# Altium PCB Плата.PcbDoc
Units mm, origin at the board's own origin, x right, y up, seen from the top; angles counter-clockwise.
Board outline 115 x 115 mm, 2 copper layers (Top Layer, Bottom Layer); 55 components, 70 nets, 300 pads, 90 vias.
Unrouted connection lines stored in the file: 180.
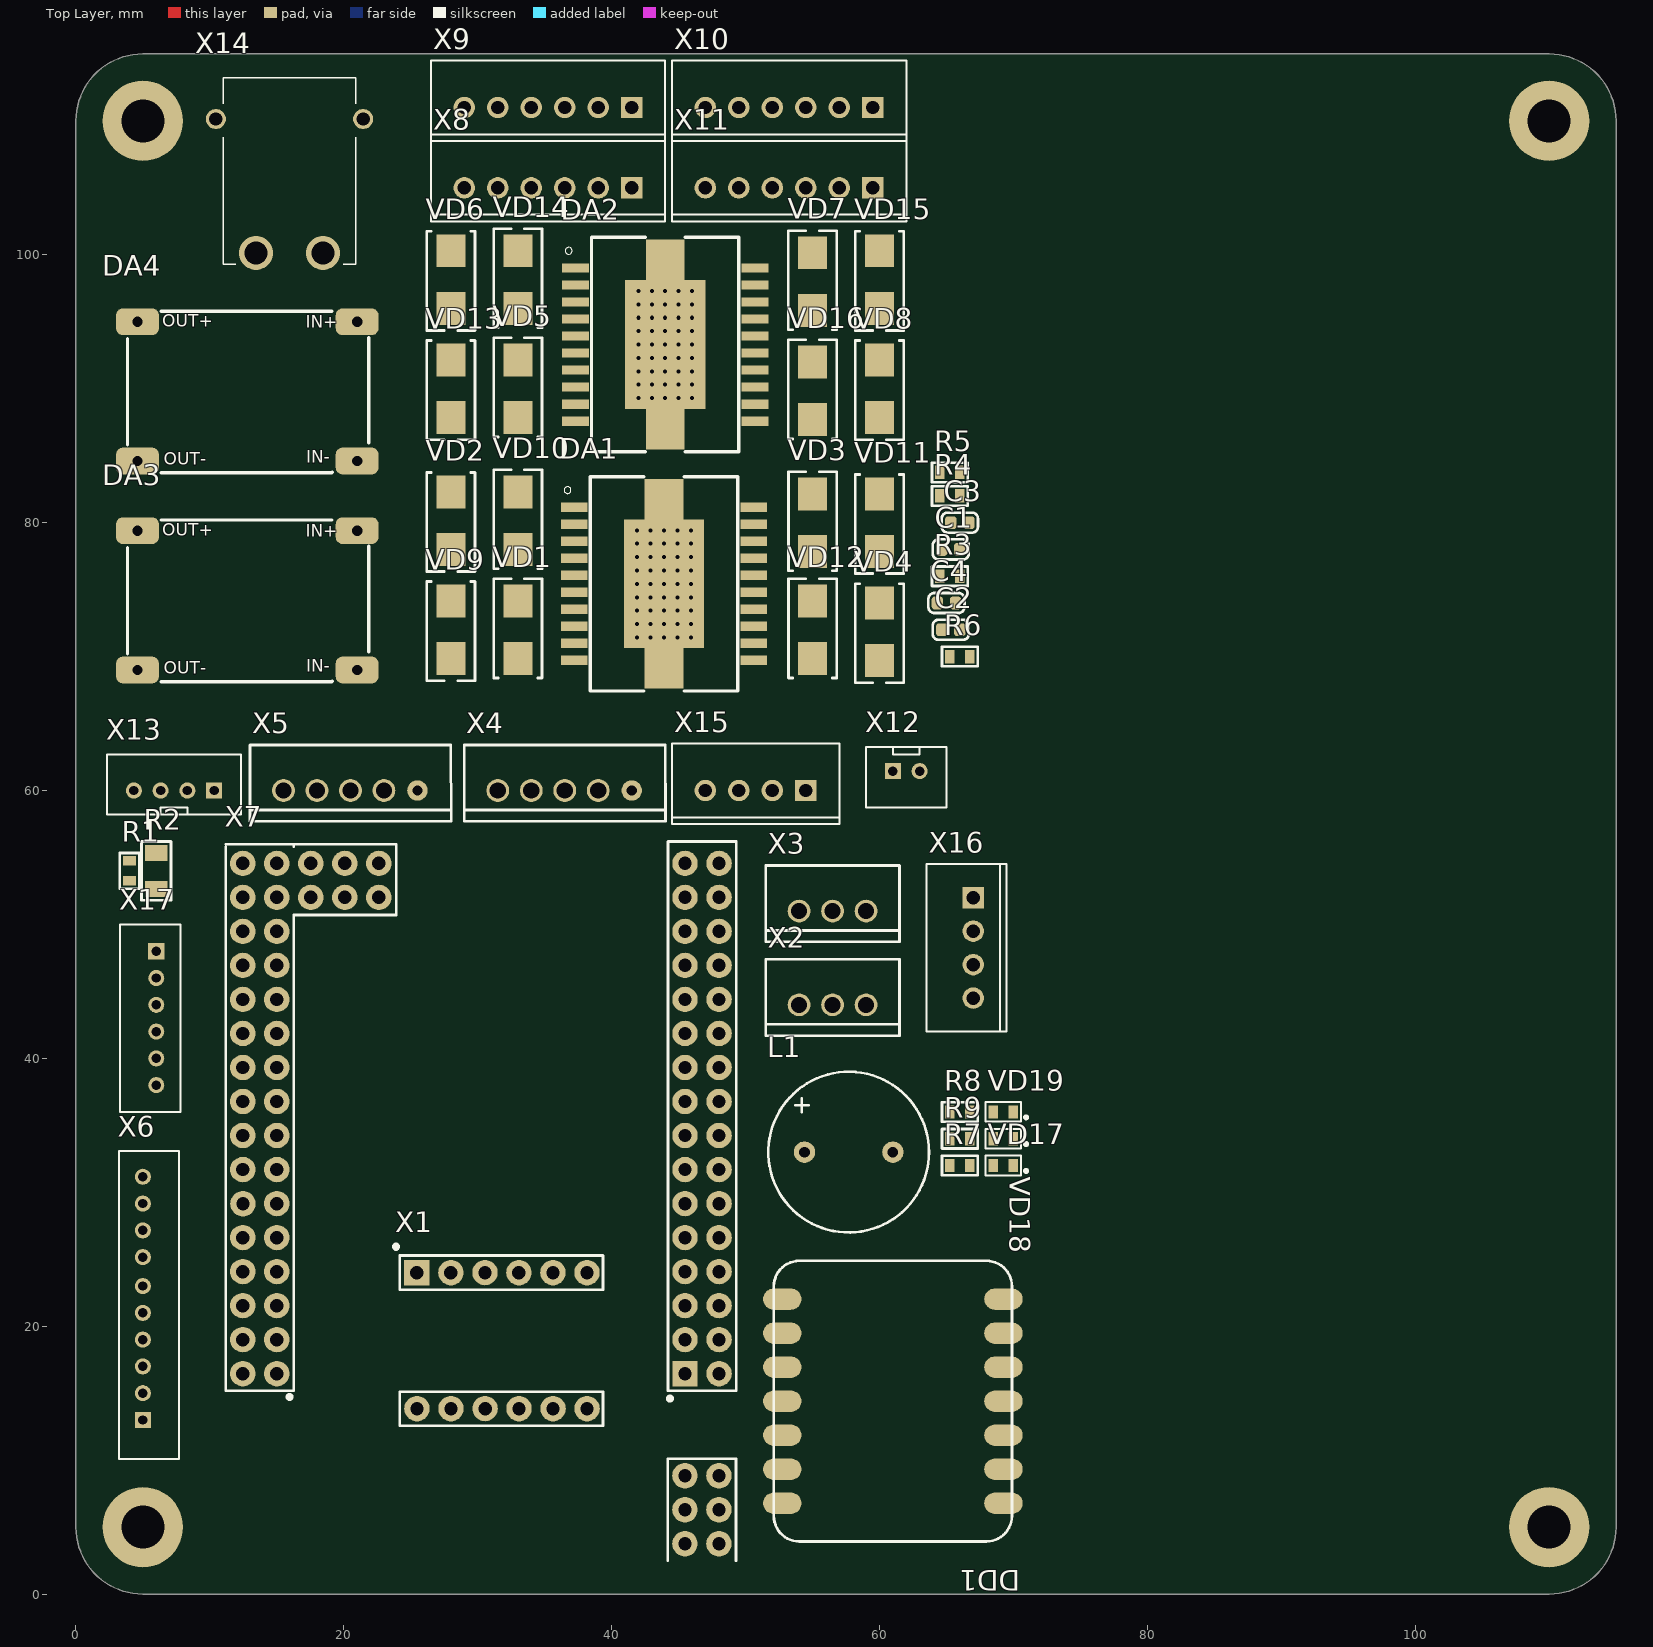
[diagram p0: Top Layer view]
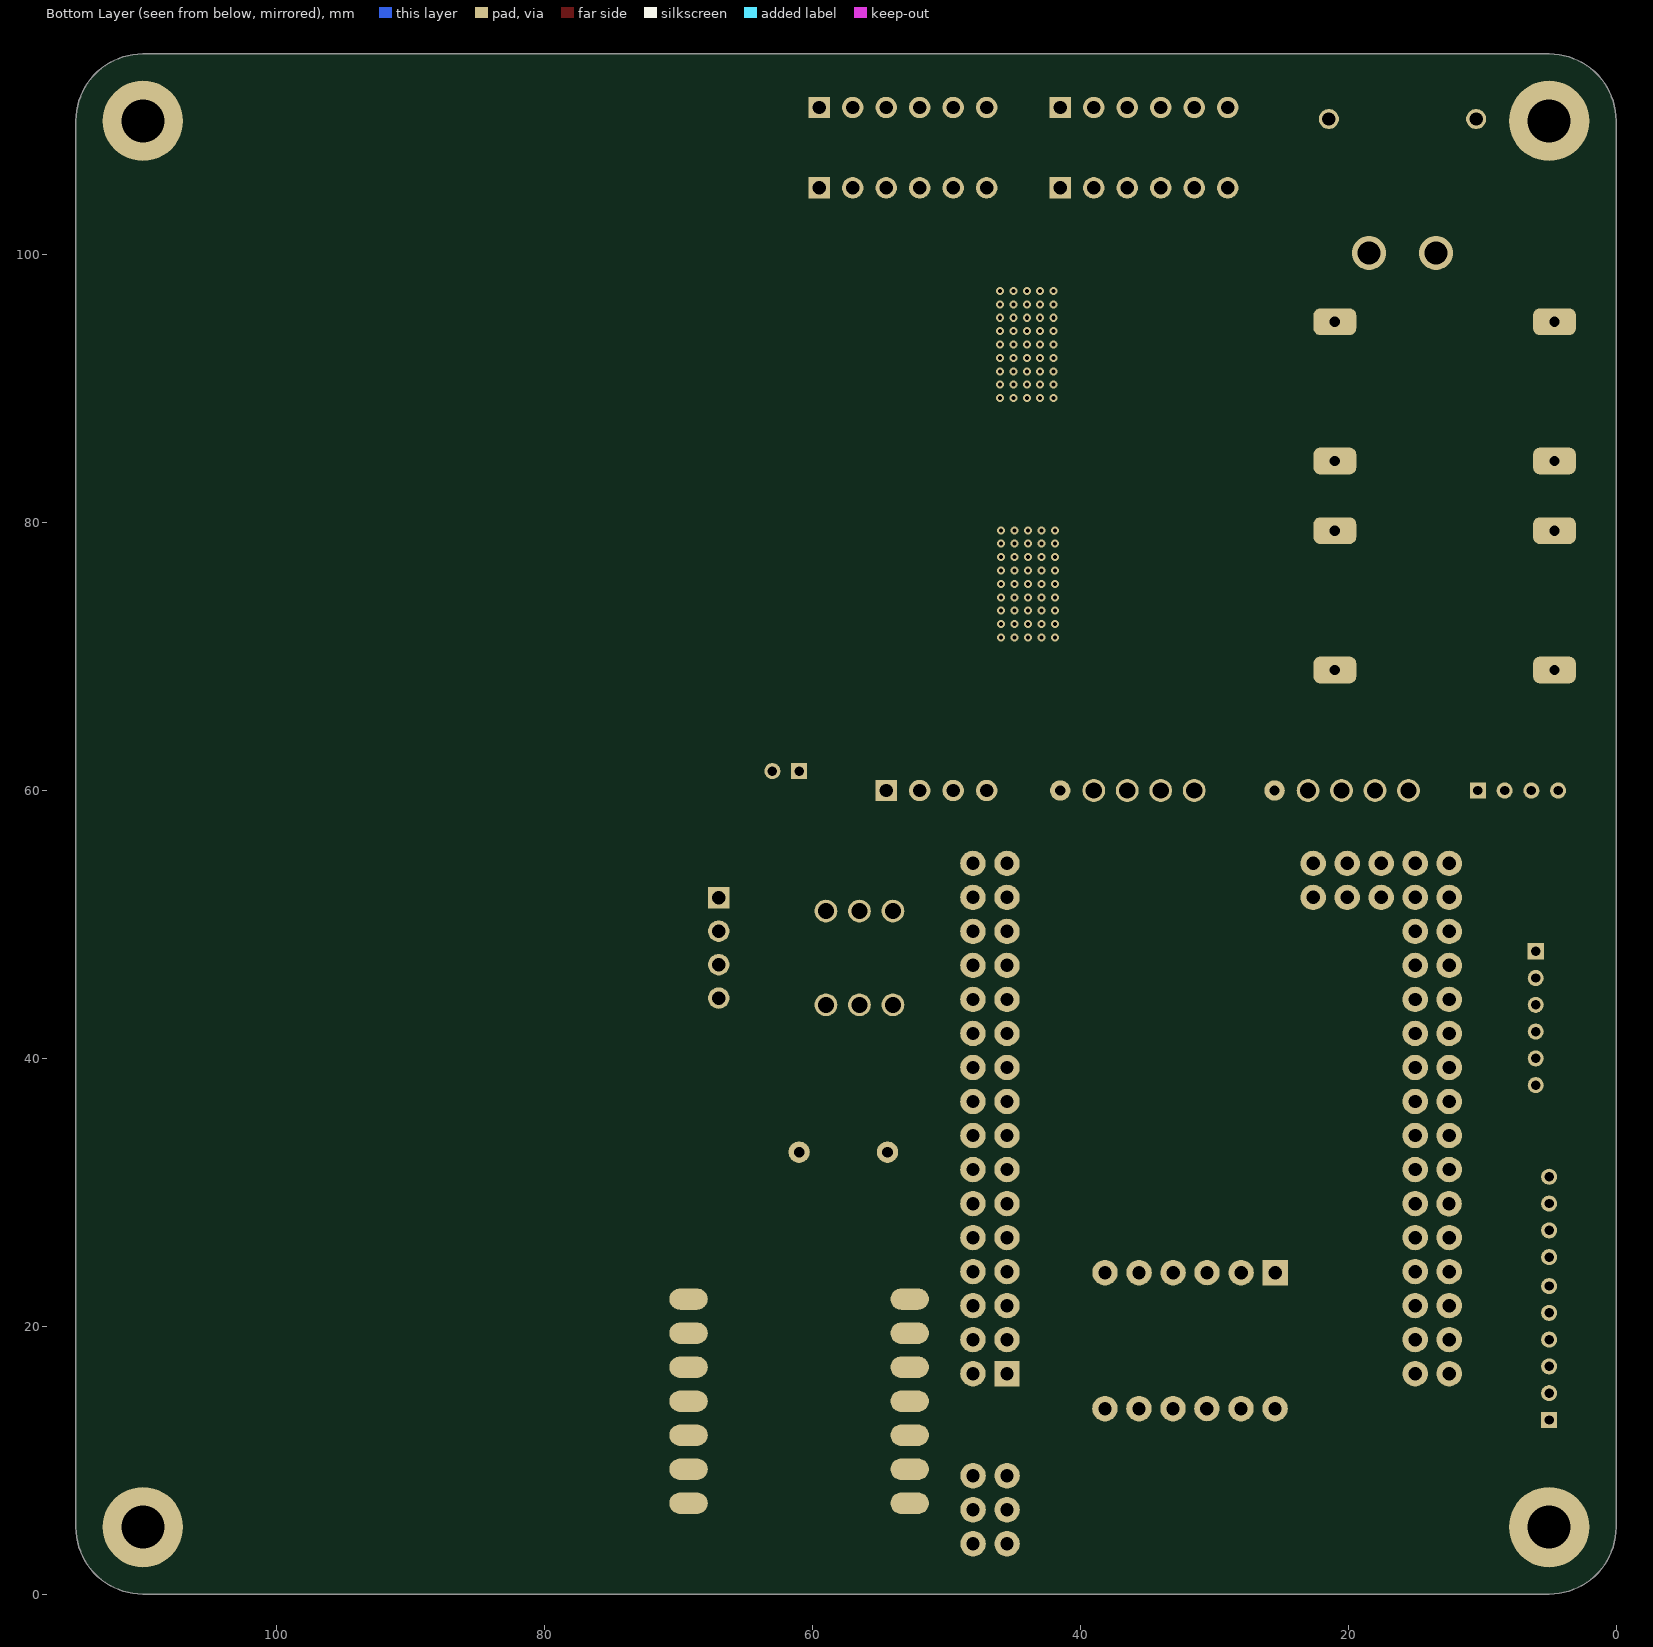
[diagram p1: Bottom Layer view, seen from below]

## Layer stack, top to bottom
Top Solder: solder mask 0.0102, Solder Resist, Dk 3.5
Top Layer: signal copper 0.0356
Dielectric 1: dielectric 0.32, FR-4, Dk 4.8
Bottom Layer: signal copper 0.0356
Bottom Solder: solder mask 0.0102, Solder Resist, Dk 3.5

## Board outline
5,0 cw(c5,5) 0,5 0,110 cw(c5,110) 5,115 110,115 cw(c110,110) 115,110 115,5 cw(c110,5) 110,0

## Design rules (kind name [scope] priority, off if disabled: settings)
AcuteAngle min_acute_angle [OnCopper] p1: minimum=3.50000000000000E+0001 checktracksonly=FALSE // Минимальный угол между примитивами топологии
BoardOutlineClearance board_outline_clearance_std [NOT (OnLayer('Bottom Overlay') OR OnLayer('Top Overlay'))] p1: gap=0.25 ignorepadtopadclearanceinfootprint=FALSE except(0: Arc-SplitContinuation Track-SplitContinuation SMDPad-SplitContinuation THPad-SplitContinuation Via-SplitContinuation Fill-SplitContinuation Poly-SplitContinuation Region-SplitContinuation Text-SplitContinuation) // Отступ элементов топологии от края фрезеруемой печатной платы
Clearance clearance_outer_18um_std [OnTopLayer OR OnBottomLayer] p1: gap=0.125 ignorepadtopadclearanceinfootprint=TRUE except(0.2: Arc-Fill Arc-Poly Track-Fill Track-Poly SMDPad-SMDPad SMDPad-Fill SMDPad-Poly THPad-Fill THPad-Poly Via-Fill Via-Poly Fill-Fill Fill-Poly Poly-Poly Poly-Region Poly-Text; 0.25: Arc-Hole Track-Hole SMDPad-Hole THPad-Hole Via-Hole Fill-Hole Poly-Hole Region-Hole Text-Hole) // Зазоры на внешних слоях
Clearance clearance_inner_18um_std [NOT (OnTopLayer Or OnBottomLayer)] p2: gap=0.125 ignorepadtopadclearanceinfootprint=FALSE except(0.2: Arc-Fill Arc-Poly Track-Fill Track-Poly SMDPad-SMDPad SMDPad-Fill SMDPad-Poly THPad-Fill THPad-Poly Via-Fill Via-Poly Fill-Fill Fill-Poly Poly-Poly Poly-Region Poly-Text; 0.25: Arc-Hole Track-Hole SMDPad-Hole THPad-Hole Via-Hole Fill-Hole Poly-Hole Region-Hole Text-Hole) // Зазоры на внутренних слоях
ComponentClearance [All] p1: gap=0 collisioncheckmode=3 verticalgap=0 showdistances=FALSE
DiffPairsRouting diff_pairs_routing [All] p1: maxlimit=0.127 minlimit=0.127 mostfreqgap=0.127 toplayer_minwidth=0.143 toplayer_maxwidth=0.143 toplayer_prefwidth=0.143 bottomlayer_minwidth=0.143 bottomlayer_maxwidth=0.143 bottomlayer_prefwidth=0.143 impedanceprofiledriven=TRUE impedanceprofileid={FD46899E-B5A2-4EF5-A302-5D2DB6A51F35} maxuncoupledlength=12.7 // Правила трассировки дифференциальных пар
HoleSize min_hole_size_std [IsPad] p1: absolutevalues=TRUE maxlimit=5.9 minlimit=0.6 maxpercent=80.000 minpercent=20.000 // Диаметр межслойного переходного отверстия
HoleSize min_hole_size_via_std [IsVia] p2: absolutevalues=TRUE maxlimit=5.9 minlimit=0.3 maxpercent=80.000 minpercent=20.000 // Минимальный диаметр монтажного отверстия
HoleToHoleClearance hole_to_hole_clearance_std [All] p1: gap=0.2 allowstackedmicrovias=FALSE // Минимальное расстояние между краями двух отверстий
MinimumAnnularRing min_via_ar_std [All] p1: minimumring=0.15 // Поясок площадки переходного отверстия (Annular ring VIA)
MinimumAnnularRing min_pad_ar_std [All] p2: minimumring=0.2 // Поясок монтажной контактной площадки (Annular ring PAD)
MinimumSolderMaskSliver min_solder_mask_bridge_std [All] p1: minsoldermaskwidth=0.15 // Мнимальная ширина масочного мостика
PlaneClearance plane_clearance_18um_std [All] p1: clearance=0.2 // Отступ полигона (для слоя plane) от элементов топологии
PlaneConnect [All] p1: planeconnectstyle=Relief reliefexpansion=0.5 reliefentries=4 reliefconductorwidth=0.2 reliefairgap=0.2
PolygonConnect poly_connect_to_pad<=0.3 [(AsMM(PadXSize_AllLayers)<=0.301) or (AsMM(PadYSize_AllLayers)<=0.301)] p1: thpad.connectstyle=Relief thpad.reliefconductorwidth=0.2 thpad.reliefentries=4 thpad.polygonreliefangle="90 Angle" thpad.airgapwidth=0.2 smdpad.connectstyle=Relief smdpad.reliefconductorwidth=0.2 smdpad.reliefentries=4 smdpad.polygonreliefangle="90 Angle" smdpad.airgapwidth=0.2 via.connectstyle=Direct via.reliefconductorwidth=0.254 via.reliefentries=4 via.polygonreliefangle="90 Angle" via.airgapwidth=0.254 // Правила подключения полигонов для падов от 0,3мм и меньше
PolygonConnect poly_connect_to_pad<=0.4 [(AsMM(PadXSize_AllLayers)<=0.401) or (AsMM(PadYSize_AllLayers)<=0.401)] p2: thpad.connectstyle=Relief thpad.reliefconductorwidth=0.26 thpad.reliefentries=4 thpad.polygonreliefangle="90 Angle" thpad.airgapwidth=0.2 smdpad.connectstyle=Relief smdpad.reliefconductorwidth=0.26 smdpad.reliefentries=4 smdpad.polygonreliefangle="90 Angle" smdpad.airgapwidth=0.2 via.connectstyle=Direct via.reliefconductorwidth=0.254 via.reliefentries=4 via.polygonreliefangle="90 Angle" via.airgapwidth=0.254 // Правила подключения полигонов для падов от 0,4 и меньше
PolygonConnect poly_connect_to_pad<=0.6 [(AsMM(PadXSize_AllLayers)<=0.601) or (AsMM(PadYSize_AllLayers)<=0.601)] p3: thpad.connectstyle=Relief thpad.reliefconductorwidth=0.33 thpad.reliefentries=4 thpad.polygonreliefangle="90 Angle" thpad.airgapwidth=0.2 smdpad.connectstyle=Relief smdpad.reliefconductorwidth=0.33 smdpad.reliefentries=4 smdpad.polygonreliefangle="90 Angle" smdpad.airgapwidth=0.2 via.connectstyle=Direct via.reliefconductorwidth=0.254 via.reliefentries=4 via.polygonreliefangle="90 Angle" via.airgapwidth=0.254 // Правила подключения полигонов для падов от 0,6мм и меньше
PolygonConnect poly_connect_to_pad<=0.7 [(AsMM(PadXSize_AllLayers)<=0.701) or (AsMM(PadYSize_AllLayers)<=0.701)] p4: thpad.connectstyle=Relief thpad.reliefconductorwidth=0.46 thpad.reliefentries=4 thpad.polygonreliefangle="90 Angle" thpad.airgapwidth=0.2 smdpad.connectstyle=Relief smdpad.reliefconductorwidth=0.46 smdpad.reliefentries=4 smdpad.polygonreliefangle="90 Angle" smdpad.airgapwidth=0.2 via.connectstyle=Direct via.reliefconductorwidth=0.254 via.reliefentries=4 via.polygonreliefangle="90 Angle" via.airgapwidth=0.254 // Правила подключения полигонов для падов от 0,7мм и меньше
PolygonConnect poly_connect_to_pad<=0.8 [(AsMM(PadXSize_AllLayers)<=0.8)or(AsMM(PadYSize_AllLayers)<=0.8)] p5: thpad.connectstyle=Relief thpad.reliefconductorwidth=0.53 thpad.reliefentries=4 thpad.polygonreliefangle="90 Angle" thpad.airgapwidth=0.3 smdpad.connectstyle=Relief smdpad.reliefconductorwidth=0.53 smdpad.reliefentries=4 smdpad.polygonreliefangle="90 Angle" smdpad.airgapwidth=0.2 via.connectstyle=Direct via.reliefconductorwidth=0.254 via.reliefentries=4 via.polygonreliefangle="90 Angle" via.airgapwidth=0.254 // Правила подключения полигонов для падов от 0,8мм и меньше
PolygonConnect poly_connect_to_pad<=1 [(AsMM(PadXSize_AllLayers)<=1.01)or(AsMM(PadYSize_AllLayers)<=1.01)] p6: thpad.connectstyle=Relief thpad.reliefconductorwidth=0.6 thpad.reliefentries=4 thpad.polygonreliefangle="90 Angle" thpad.airgapwidth=0.3 smdpad.connectstyle=Relief smdpad.reliefconductorwidth=0.6 smdpad.reliefentries=4 smdpad.polygonreliefangle="90 Angle" smdpad.airgapwidth=0.2 via.connectstyle=Direct via.reliefconductorwidth=0.254 via.reliefentries=4 via.polygonreliefangle="90 Angle" via.airgapwidth=0.254 // Правила подключения полигонов для падов от 1мм и меньше
PolygonConnect poly_connect_to_pad<=1.3 [(AsMM(PadXSize_AllLayers)<=1.31)or(AsMM(PadYSize_AllLayers)<=1.31)] p7: thpad.connectstyle=Relief thpad.reliefconductorwidth=0.66 thpad.reliefentries=4 thpad.polygonreliefangle="90 Angle" thpad.airgapwidth=0.3 smdpad.connectstyle=Relief smdpad.reliefconductorwidth=0.86 smdpad.reliefentries=4 smdpad.polygonreliefangle="90 Angle" smdpad.airgapwidth=0.2 via.connectstyle=Direct via.reliefconductorwidth=0.254 via.reliefentries=4 via.polygonreliefangle="90 Angle" via.airgapwidth=0.254 // Правила подключения полигонов для падов от 1,3мм и меньше
PolygonConnect poly_connect_to_pad<=1.6 [(AsMM(PadXSize_AllLayers)<=1.61)or(AsMM(PadYSize_AllLayers)<=1.61)] p8: thpad.connectstyle=Relief thpad.reliefconductorwidth=0.8 thpad.reliefentries=4 thpad.polygonreliefangle="90 Angle" thpad.airgapwidth=0.3 smdpad.connectstyle=Relief smdpad.reliefconductorwidth=1 smdpad.reliefentries=4 smdpad.polygonreliefangle="90 Angle" smdpad.airgapwidth=0.2 via.connectstyle=Direct via.reliefconductorwidth=0.254 via.reliefentries=4 via.polygonreliefangle="90 Angle" via.airgapwidth=0.254 // Правила подключения полигонов для падов от 1,6мм и меньше
PolygonConnect poly_connect_to_pad<=1.8 [(AsMM(PadXSize_AllLayers)<=1.8)or(AsMM(PadYSize_AllLayers)<=1.8)] p9: thpad.connectstyle=Relief thpad.reliefconductorwidth=1 thpad.reliefentries=4 thpad.polygonreliefangle="90 Angle" thpad.airgapwidth=0.3 smdpad.connectstyle=Relief smdpad.reliefconductorwidth=1.2 smdpad.reliefentries=4 smdpad.polygonreliefangle="90 Angle" smdpad.airgapwidth=0.2 via.connectstyle=Direct via.reliefconductorwidth=0.254 via.reliefentries=4 via.polygonreliefangle="90 Angle" via.airgapwidth=0.254 // Правила подключения полигонов для падов от 1,8мм и меньше
PolygonConnect poly_connect_to_pad<=2 [(AsMM(PadXSize_AllLayers)<=2.01)or(AsMM(PadYSize_AllLayers)<=2.01)] p10: thpad.connectstyle=Relief thpad.reliefconductorwidth=1.1 thpad.reliefentries=4 thpad.polygonreliefangle="90 Angle" thpad.airgapwidth=0.3 smdpad.connectstyle=Relief smdpad.reliefconductorwidth=1.4 smdpad.reliefentries=4 smdpad.polygonreliefangle="90 Angle" smdpad.airgapwidth=0.2 via.connectstyle=Direct via.reliefconductorwidth=0.254 via.reliefentries=4 via.polygonreliefangle="90 Angle" via.airgapwidth=0.254 // Правила подключения полигонов для падов от 2мм и меньше
PolygonConnect poly_connect_to_pad<=2.3 [(AsMM(PadXSize_AllLayers)<=2.31)or(AsMM(PadYSize_AllLayers)<=2.31)] p11: thpad.connectstyle=Relief thpad.reliefconductorwidth=1.2 thpad.reliefentries=4 thpad.polygonreliefangle="90 Angle" thpad.airgapwidth=0.3 smdpad.connectstyle=Relief smdpad.reliefconductorwidth=1.4 smdpad.reliefentries=4 smdpad.polygonreliefangle="90 Angle" smdpad.airgapwidth=0.2 via.connectstyle=Direct via.reliefconductorwidth=0.254 via.reliefentries=4 via.polygonreliefangle="90 Angle" via.airgapwidth=0.254 // Правила подключения полигонов для падов от 2,3мм и меньше
PolygonConnect poly_connect_to_pad<=2.5 [(AsMM(PadXSize_AllLayers)<=2.51)or(AsMM(PadYSize_AllLayers)<=2.51)] p12: thpad.connectstyle=Relief thpad.reliefconductorwidth=1.2 thpad.reliefentries=4 thpad.polygonreliefangle="90 Angle" thpad.airgapwidth=0.3 smdpad.connectstyle=Relief smdpad.reliefconductorwidth=1.4 smdpad.reliefentries=4 smdpad.polygonreliefangle="90 Angle" smdpad.airgapwidth=0.2 via.connectstyle=Direct via.reliefconductorwidth=0.254 via.reliefentries=4 via.polygonreliefangle="90 Angle" via.airgapwidth=0.254 // Правила подключения полигонов для падов от 2,5мм и меньше
PolygonConnect poly_connect_to_pad<=2.7 [(AsMM(PadXSize_AllLayers)<=2.71)or(AsMM(PadYSize_AllLayers)<=2.71)] p13: thpad.connectstyle=Relief thpad.reliefconductorwidth=1.4 thpad.reliefentries=4 thpad.polygonreliefangle="90 Angle" thpad.airgapwidth=0.3 smdpad.connectstyle=Relief smdpad.reliefconductorwidth=1.6 smdpad.reliefentries=4 smdpad.polygonreliefangle="90 Angle" smdpad.airgapwidth=0.2 via.connectstyle=Direct via.reliefconductorwidth=0.254 via.reliefentries=4 via.polygonreliefangle="90 Angle" via.airgapwidth=0.254 // Правила подключения полигонов для падов от 2,7мм и меньше
PolygonConnect poly_connect_to_pad<=3 [(AsMM(PadXSize_AllLayers)<=3.01)or(AsMM(PadYSize_AllLayers)<=3.01)] p14: thpad.connectstyle=Relief thpad.reliefconductorwidth=1.6 thpad.reliefentries=4 thpad.polygonreliefangle="90 Angle" thpad.airgapwidth=0.3 smdpad.connectstyle=Relief smdpad.reliefconductorwidth=1.8 smdpad.reliefentries=4 smdpad.polygonreliefangle="90 Angle" smdpad.airgapwidth=0.2 via.connectstyle=Direct via.reliefconductorwidth=0.254 via.reliefentries=4 via.polygonreliefangle="90 Angle" via.airgapwidth=0.254 // Правила подключения полигонов для падов от 3мм и меньше
PolygonConnect poly_connect_to_pad<=7 [(AsMM(PadXSize_AllLayers)<7.01)or(AsMM(PadYSize_AllLayers)<=7.01)] p15: thpad.connectstyle=Relief thpad.reliefconductorwidth=2 thpad.reliefentries=4 thpad.polygonreliefangle="90 Angle" thpad.airgapwidth=0.4 smdpad.connectstyle=Relief smdpad.reliefconductorwidth=2 smdpad.reliefentries=4 smdpad.polygonreliefangle="90 Angle" smdpad.airgapwidth=0.3 via.connectstyle=Direct via.reliefconductorwidth=0.254 via.reliefentries=4 via.polygonreliefangle="90 Angle" via.airgapwidth=0.254 // Правила подключения полигонов для падов от 7мм и меньше
PolygonConnect poly_connect_to_pad [All] p16: thpad.connectstyle=Relief thpad.reliefconductorwidth=0.25 thpad.reliefentries=4 thpad.polygonreliefangle="90 Angle" thpad.airgapwidth=0.2 smdpad.connectstyle=Relief smdpad.reliefconductorwidth=0.25 smdpad.reliefentries=4 smdpad.polygonreliefangle="90 Angle" smdpad.airgapwidth=0.2 via.connectstyle=Direct via.reliefconductorwidth=0.25 via.reliefentries=4 via.polygonreliefangle="90 Angle" via.airgapwidth=0.2 // Правила подключения полигонов общие
RoutingCorners [All] p1 off: cornerstyle=45-Degree minsetback=2.5 maxsetback=2.5
RoutingVias [All] p1: holewidth=0.3 width=0.6 viastyle="Through Hole" minholewidth=0.3 minwidth=0.6 maxholewidth=5.9 maxwidth=6.4
SilkToSilkClearance silk_to_silk_clearance_std [All] p1 off: silktosilkclearance=0.15 // Отступ текста шелкографии от других примитивов шелкографии
SilkToSolderMaskClearance silk_to_solder_mask_clearance_std [IsPad] p1 off: minsilkscreentomaskgap=0.15 clearancetoexposedcopper=FALSE // Минимальное расстояние между элементами шелкографии и вскрытой медью
SolderMaskExpansion solder_mask_expansion_std [All] p1: expansion=0.05 istentingtop=FALSE // Припуск паяльной масски
SupplyNets "Schematic Supply Nets_4" [InNet('+5B_Logic')] p1: voltage=0.000
SupplyNets "Schematic Supply Nets_3" [InNet('+3B3')] p2: voltage=0.000
SupplyNets "Schematic Supply Nets_2" [InNet('Vbat')] p3: voltage=0.000
SupplyNets "Schematic Supply Nets_1" [InNet('+5B')] p4: voltage=0.000
SupplyNets "Schematic Supply Nets" [InNet('GND')] p5: voltage=0.000
UnRoutedNet [All] p1: checkbadconnections=TRUE
Width width_18um_std [All] p1: maxlimit=10 minlimit=0.125 preferedwidth=0.15 checkconnectedcopper=TRUE // Ширина проводников (общая)
19 further rules are at their usual default settings.

## Components (designator, comment, footprint, x,y, rotation, side; value= is the part's Value field where it differs from the comment)
C1 "100" C0603 65.325,78 r180 top
C2 "100" C0603 65.325,72 r180 top
C3 "100" C0603 66,80 r0 top
C4 "100" C0603 65,74 r180 top
DA1 "L298" L298P 43.911,75.429 r0 top
DA2 "L298" L298P 44,93.3 r0 top
DA3 "4R7" mini360 4.6,79.4 r0 top
DA4 "4R7" mini360 4.6,95 r0 top
DD1 "XIAO nRF52840" "SEEED STUDIO XIAO NRF52840" 61,14.405 r270 top
L1 "HC-12085" Buzzer 57.7,33 r0 top
R1 "30к" R0603 4,54 r270 top
R2 "10к" R1206 6,54 r90 top
R3 "10к" R0603 65.25,76 r180 top
R4 "1к" R0603 65.25,82 r180 top
R5 "10к" R0603 65.25,83.75 r180 top
R6 "10к" R0603 66,70 r180 top
R7 "1к" R0603 66,32 r0 top
R8 "1к" R0603 66,36 r180 top
R9 "1к" R0603 66,34 r0 top
VD1 "MBRS2100" DO-214AA 33,72 r90 top
VD2 "MBRS2100" DO-214AA 28,80.15 r270 top
VD3 "MBRS2100" DO-214AA 55,80 r90 top
VD4 "MBRS2100" DO-214AA 60,71.85 r270 top
VD5 "MBRS2100" DO-214AA 33,90 r90 top
VD6 "MBRS2100" DO-214AA 28,98.15 r270 top
VD7 "MBRS2100" DO-214AA 55,98 r90 top
VD8 "MBRS2100" DO-214AA 60,90 r270 top
VD9 "MBRS2100" DO-214AA 28,72 r270 top
VD10 "MBRS2100" DO-214AA 33,80.15 r90 top
VD11 "MBRS2100" DO-214AA 60,80 r270 top
VD12 "MBRS2100" DO-214AA 55,72 r90 top
VD13 "MBRS2100" DO-214AA 28,90 r270 top
VD14 "MBRS2100" DO-214AA 33,98.15 r90 top
VD15 "MBRS2100" DO-214AA 60,98.15 r270 top
VD16 "MBRS2100" DO-214AA 55,89.85 r90 top
VD17 "Зеленый светодиод" VD0603 69.25,32 r0 top
VD18 "Красный светодиод" VD0603 69.25,34 r0 top
VD19 "Синий светодиод" VD0603 69.25,36 r0 top
X1 "Logic Conventor" "LOGIC CONVENTOR" 25.465,24.005 r0 top
X2 "DS1069-3M (CWF-3)" CWF-3 56.5,44.55 r90 top
X3 "DS1069-3M (CWF-3)" CWF-3 56.5,51.55 r90 top
X4 "DS1069-5M (CWF-5)" CWF-5 36.5,60 r270 top
X5 "DS1069-5M (CWF-5)" CWF-5 20.5,60 r270 top
X6 "MW-10M" MW-10M 5.45,22.08 r180 top
X7 "Arduino Mega Pro" "Arduino Mega Pro Mini" 13.73,19 r90 top
X8 "DS1069-6M (CWF-6)" CWF-6 41.5,105 r270 top
X9 "DS1069-6M (CWF-6)" CWF-6 41.5,111 r270 top
X10 "DS1069-6M (CWF-6)" CWF-6 59.5,111 r270 top
X11 "DS1069-6M (CWF-6)" CWF-6 59.5,105 r270 top
X12 "DS1066-02M (MW-2M)" MW-2M 62,61 r90 top
X13 "DS1066-04M (MW-4M)" MW-4M 7.325,60.45 r270 top
X14 "XT30" "XT30 - DUPLICATE" 16,106 r0 top
X15 "DS1069-4M (CWF-4)" CWF-4 54.5,60 r270 top
X16 "DS1069-4M (CWF-4)" CWF-4 67,52 r0 top
X17 "DS1066-06M (MW-6M)" MW-6M 5.55,43 r0 top

## Footprints (in the part's own frame and the unit in brackets; to place one, negate y for a bottom-side part, rotate by r counter-clockwise, add the part's x,y. Pads: shape width x height; smd on the part's side, far side on the other; paste and mask are expansions set on the pad)
"Arduino Mega Pro Mini" [mm]
  rect 1.9x1.9 hole 1: 1(-2.54,-31.75)
  round 1.9 hole 1: 2(-2.54,-34.29) 3(0,-31.75) 7(5.08,-31.75) 8(5.08,-34.29) 13(12.7,-31.75) 14(12.7,-34.29) 19(20.32,-31.75) 20(20.32,-34.29) 25(27.94,-31.75) 26(27.94,-34.29) 31(35.56,-31.75) 32(35.56,-34.29) 33(17.78,1.27) 34(17.78,-1.27) 35(20.32,1.27) 39(25.4,1.27) 40(25.4,-1.27) 45(33.02,1.27) 46(33.02,-1.27) 51(35.56,-6.35) 52(33.02,-6.35) 57(0,1.27) 58(0,-1.27) 63(7.62,1.27) 64(7.62,-1.27) 69(15.24,1.27) 70(15.24,-1.27) 71(-15.24,-34.285) 72(-15.24,-31.745) 73(-12.7,-34.285)
  round 1.9 hole 1 mask+0.102: 4(0,-34.29) 5(2.54,-31.75) 6(2.54,-34.29) 9(7.62,-31.75) 10(7.62,-34.29) 11(10.16,-31.75) 12(10.16,-34.29) 15(15.24,-31.75) 16(15.24,-34.29) 17(17.78,-31.75) 18(17.78,-34.29) 21(22.86,-31.75) 22(22.86,-34.29) 23(25.4,-31.75) 24(25.4,-34.29) 27(30.48,-31.75) 28(30.48,-34.29) 29(33.02,-31.75) 30(33.02,-34.29) 36(20.32,-1.27) 37(22.86,1.27) 38(22.86,-1.27) 41(27.94,1.27) 42(27.94,-1.27) 43(30.48,1.27) 44(30.48,-1.27) 47(35.56,1.27) 48(35.56,-1.27) 49(35.56,-3.81) 50(33.02,-3.81) 53(35.56,-8.89) 54(33.02,-8.89) 55(-2.54,1.27) 56(-2.54,-1.27) 59(2.54,1.27) 60(2.54,-1.27) 61(5.08,1.27) 62(5.08,-1.27) 65(10.146,1.257) 66(10.16,-1.27) 67(12.7,1.27) 68(12.7,-1.27) 74(-12.7,-31.745) 75(-10.16,-34.285) 76(-10.16,-31.745)
  silkscreen extent -16.52,-35.57 37.2,2.54, body extent -17.18,-35.6 37.08,2.5, height 13.94
Buzzer [mm]
  round 1.6 hole 0.8: 1(-3.3,0) 2(3.3,0)
  silkscreen extent -6,-6 6,6, body extent -6,-5.99 6,5.99, height 8.5
C0603 [mm] "Chip Capacitor, 2-Leads, Body 1,60x0,80mm, IPC Medium Density"
  rrect50% 0.85x0.95 smd: 1(-0.675,0) 2(0.675,0)
  Top Layer pour cut-out: -0.254,0.5 -0.254,-0.5 0.254,-0.5 0.254,0.5
  silkscreen extent -1.35,-0.75 1.35,0.75, body extent -0.85,-0.45 0.85,0.45, height 0.9
CWF-3 [mm]
  round 1.7 hole 1.2: 1(-0.55,-2.5) 2(-0.55,0) 3(-0.55,2.5)
  silkscreen extent -2.85,-5 2.85,5, body extent -2.9,-5 2.8,5, height 7.7
CWF-4 [mm]
  rect 1.6x1.6 hole 1: 1(0,0)
  round 1.6 hole 1: 2(0,-2.5) 3(0,-5) 4(0,-7.5)
  silkscreen extent -3.5,-10 2.5,2.5, body extent -3.55,-9.95 2.2,2.45, height 7
CWF-5 [mm]
  round 1.7 hole 1.2: 1(0,-5) 2(0,-2.5) 3(0,0) 4(0,2.5)
  round 1.524 hole 0.762: 5(0,5)
  silkscreen extent -3.4,-7.5 2.3,7.52, body extent -3.45,-7.5 2.3,7.5, height 7
CWF-6 [mm]
  rect 1.6x1.6 hole 1: 1(0,0)
  round 1.6 hole 1: 2(0,-2.5) 3(0,-5) 4(0,-7.5) 5(0,-10) 6(0,-12.5)
  silkscreen extent -3.5,-15 2.5,2.5, body extent -3.52,-15 2.22,2.5, height 7
DO-214AA [mm]
  rect 2.45x2.15 smd: 1(-2.15,0) 2(2.15,0)
  silkscreen extent -3.6,-1.8 3.8,1.8, body extent -2.6,-1.8 2.6,1.8, height 2.4
L298P [mm]
  rect 2x0.7 smd: 1(-6.7,5.715) 2(-6.7,4.445) 3(-6.7,3.175) 4(-6.7,1.905) 5(-6.7,0.635) 6(-6.7,-0.635) 7(-6.7,-1.905) 8(-6.7,-3.175) 9(-6.7,-4.445) 10(-6.7,-5.715) 11(6.7,-5.715) 12(6.7,-4.445) 13(6.7,-3.175) 14(6.7,-1.905) 15(6.7,-0.635) 16(6.7,0.635) 17(6.7,1.905) 18(6.7,3.175) 19(6.7,4.445) 20(6.7,5.715)
  rect 6x9.6 smd paste-6: 21(0,0)
  rect 2.9x3.05 smd paste-3: 22(0,6.3) 23(0,-6.3)
  silkscreen extent -7.45,-8 5.5,8, body extent -7.1,-7.95 7.1,7.95, height 3.6
"LOGIC CONVENTOR" [mm]
  rect 1.9x1.9 hole 1: 1(-0.005,-0.005)
  round 1.9 hole 1: 2(2.535,-0.005) 3(5.08,0) 4(7.615,-0.005) 5(10.155,-0.005) 6(12.695,-0.005) 7(0,-10.16) 8(2.54,-10.16) 9(5.085,-10.155) 10(7.62,-10.16) 11(10.16,-10.16) 12(12.7,-10.16)
  silkscreen extent -1.56,-11.44 13.89,1.93, body extent -1.28,-11.46 13.98,1.3, height 5.5
mini360 [mm]
  rrect50% 3.2x2 hole 0.762: 1(0,0) 2(0,-10.4) 3(16.4,0) 4(16.4,-10.4)
  silkscreen extent -0.75,-11.28 17.28,0.8, body extent -0.73,-11.23 17.27,0.77, height 3.75
MW-2M [mm]
  rect 1.2x1.2 hole 0.7: 1(0.45,1)
  round 1.2 hole 0.7: 2(0.45,-1)
  silkscreen extent -2.25,-3 2.25,3, body extent -2.25,-2.95 2.25,2.95, height 6
MW-4M [mm]
  rect 1.2x1.2 hole 0.7: 1(0.45,3)
  round 1.2 hole 0.7: 2(0.45,1) 3(0.45,-1) 4(0.45,-3)
  silkscreen extent -2.25,-5 2.25,5, body extent -2.25,-4.95 2.25,4.95, height 6
MW-6M [mm]
  rect 1.2x1.2 hole 0.7: 1(0.45,5)
  round 1.2 hole 0.7: 2(0.45,3) 3(0.45,1) 4(0.45,-1) 5(0.45,-3) 6(0.45,-5)
  silkscreen extent -2.25,-7 2.25,7, body extent -2.25,-6.95 2.25,6.95, height 6
MW-10M [mm]
  rect 1.2x1.2 hole 0.7: 1(0.45,9.08)
  round 1.2 hole 0.7: 2(0.45,7.08) 3(0.45,5.08) 4(0.45,3.08) 5(0.45,1.08) 6(0.45,-0.92) 7(0.45,-3.08) 8(0.45,-5.08) 9(0.45,-7.08) 10(0.45,-9.08)
  silkscreen extent -2.25,-11 2.25,12
R0603 [mm]
  rect 0.7x1 smd: 1(-0.75,0) 2(0.75,0)
  silkscreen extent -1.33,-0.73 1.33,0.73, body extent -0.8,-0.43 0.8,0.43, height 0.45
R1206 [mm] "Chip Resistor, 2-Leads, Body 3,10x1,60mm, IPC Medium Density"
  rect 1.2x1.7 smd: 1(-1.35,0) 2(1.35,0)
  silkscreen extent -2.2,-1.1 2.2,1.1, body extent -1.6,-0.8 1.6,0.8, height 0.6
"SEEED STUDIO XIAO NRF52840" [mm]
  oval 1.6x2.87 all layers, no hole: 1(7.62,8.255) 2(5.08,8.255) 3(2.54,8.255) 4(0,8.255) 5(-2.54,8.255) 6(-5.08,8.255) 7(-7.62,8.255) 8(-7.62,-8.255) 9(-5.08,-8.255) 10(-2.54,-8.255) 11(0,-8.255) 12(2.54,-8.255) 13(5.08,-8.255) 14(7.62,-8.255)
  silkscreen extent -10.48,-8.89 10.48,8.89, body extent -10.48,-8.89 12,8.89, height 4.51
VD0603 [mm]
  rect 0.7x1 smd: 1(-0.75,0) 2(0.75,0)
  Top Layer pour cut-out: -0.4,0.5 0.4,0.5 0.4,-0.5 -0.4,-0.5
  silkscreen extent -1.33,-0.73 1.8,0.73, body extent -0.82,-0.37 0.82,0.36, height 0.68
"XT30 - DUPLICATE" [mm] "XT30"
  round 2.55 hole 1.7: 1(-2.55,-5.862) 2(2.45,-5.862)
  round 1.5 hole 1: 3(5.45,4.138) 4(-5.55,4.138)
  silkscreen extent -5,-6.71 4.9,7.24, body extent -6.7,-6.66 6.6,7.29, height 5.06

## Part data
C1 C2 C3 C4: library part CC0603JRNPO9BN101, "Конденсатор кер. 100пФ 50В", Manufacturer=Yageo, Voltage=50В, Name=CC0603JRNPO9BN101, TKE=NP0
DA1 DA2: "Драйвер двигателя", Manufacturer=China, Name=L298
DA3 DA4: "Линейный стабилизатор напряжения 14.4В -> 5В", Manufacturer=China, Name=4R7
DD1: "Микроконтроллер nRF52840", HelpURL=https://wiki.seeedstudio.com/XIAO_BLE/#hardware-overview, Name="XIAO nRF52840"
L1: Manufacturer="Epcos TDK", Name=HC-12085
R1: library part RC0603FR-0730KL, "Резистор 30кОм 0,063Вт 1%", Manufacturer=YAGEO, Tolerance=1%, Name=RC0603FR-0730KL
R2: library part RC1206FR-0710KL, "Резистор 10к 0,25Вт 1%", Manufacturer=YAGEO, Name=RC1206FR-07180KL
R3 R5 R6: library part RC0603FR-0710KL, "Резистор 10кОм 0,063Вт 1%", Manufacturer=YAGEO, Tolerance=1%, Name=RC0603FR-0710KL
R4 R7 R8 R9: library part RC0603FR-071KL, "Резистор 1кОм 0,063Вт 1%", Manufacturer=YAGEO, Tolerance=1%, Name=RC0603FR-071KL
VD1 VD2 VD3 VD4 VD5 VD6 VD7 VD8 VD9 VD10 VD11 VD12 VD13 VD14 VD15 VD16: "Диод Шоттки 100В 2А", Name=MBRS2100
VD17: library part FYLS-0603BUGC, "Светодтод зеленый SMD Foryard Optoelectronics Co.", Name="Зеленый светодиод"
VD18: library part FYLS-0603BURC, "Светодтод красный SMD Foryard Optoelectronics Co.", Name="Красный светодиод"
VD19: library part FYLS-0603BUBC, "Светодтод синий SMD Foryard Optoelectronics Co.", Name="Синий светодиод"
X1: "Преобразователь уровней", Name="Logic Conventor"
X2 X3: library part CWF-3, "Разъем - 3 конт. прямая вилка на плату", Contact_1=Signal, Contact_2=VCC, Contact_3=GND, Name="DS1069-3M (CWF-3)"
X4 X5: library part CWF-5, "Разъем - 5 конт. прямая вилка на плату", Contact_1=SDA, Contact_2=SCL, Contact_3=XSHUT, Contact_4=VCC, Contact_6=Contact_6, Name="DS1069-5M (CWF-5)"
  X4: Contact_5=GND
  X5: Contact_5=Contact_5
X6: library part CWF-10, "CWF-10", Contact_1=Sinnal1, Contact_2=Sinnal2, Contact_3=Sinnal3, Contact_4=Sinnal4, Contact_5=Sinnal5, Contact_6=Sinnal6, Contact_7=Sinnal7, Contact_8=Sinnal8, Contact_9=VCC, Contact_10=GND, Name=MW-10M
X7: library part "Arduino Mega Pro Mini", "Arduino Mega Pro Mini", Name="Arduino Mega Pro"
X8 X9 X10 X11: library part CWF-6, "Разъем - 6 конт. прямая вилка на плату", Contact_1=MOT1, Contact_2=VCC, Contact_3=ENC1, Contact_4=ENC2, Contact_5=GND, Contact_6=MOT2, Name="DS1069-6M (CWF-6)"
X12: library part MW-2M, "Разъем - 2 конт. прямая вилка на плату", Contact_1=Singal, Contact_2=GND, Name="DS1066-02M (MW-2M)"
X13: library part MW-4M, "Разъем - 4 конт. прямая вилка на плату", Contact_1=BNT1, Contact_2=BNT2, Contact_3=BNT3, Contact_4=GND, Name="DS1066-04M (MW-4M)"
X15 X16: library part CWF-4, "Разъем - 4 конт. прямая вилка на плату", Contact_1=SDA, Contact_2=SCL, Contact_3=VCC, Contact_4=GND, Name="DS1069-4M (CWF-4)"
X17: library part MW-6M, "Разъем - 6 конт. прямая вилка на плату", Contact_1=MOSI, Contact_2=MISO, Contact_3=SCK, Contact_4=CS, Contact_5=VCC, Contact_6=GND, Name="DS1066-06M (MW-6M)"
X14: Contact_1=Vbat, Contact_2=GND, Name=XT30

## Free pads (board coordinates)
  round 6 hole 3.2: 1(5,5) 1(5,110) 1(110,5) 1(110,110)

## Via types
v1: diameter 0.6, hole 0.3, Top Layer to Bottom Layer, 90 vias

## Nets (pads, with @x,y where several pads share a name; then routed paths per layer and width w, separated by ;. In a path a pad name is that pad's centre, name@x,y a point inside that pad or via, vN(x,y) a via of type N, cw(c..) or ccw(c..) an arc to the next point about the centre after c; other vN are vias at no path point)
+3B3: DD1.12 X1.9 X15.3 X17.5
+5B: C3.2 C4.2 DA1.12 DA2.12 DA4.3 X2.2 X3.2
+5B_Logic: DA3.3 DD1.14 X1.3 X4.4 X5.4 X6.9 X7.75 X7.76 X8.2 X9.2 X10.2 X11.2 X13.4 X16.3
BTN1: R3.2 X7.27 X13.1
BTN2: R5.2 X7.28 X13.2
BTN3: R6.2 X7.29 X13.3
CS_nRF: DD1.1 X17.4
ENC1A: X7.3 X8.3
ENC1B: X7.4 X10.3
ENC1C: X7.19 X9.3
ENC1D: X7.20 X11.3
ENC2A: X7.47 X8.4
ENC2B: X7.48 X10.4
ENC2C: X7.49 X9.4
ENC2D: X7.50 X11.4
GND: C1.1 C2.1 C3.1 C4.1 DA1.1 DA1.2 DA1.10 DA1.11 DA1.19 DA1.20 DA2.1 DA2.2 DA2.10 DA2.11 DA2.19 DA2.20 DA3.1 DA3.4 DA4.1 DA4.4 DD1.13 L1.2 R2.2 R3.1 R4.2 R5.1 R6.1 VD3.2 VD4.2 VD7.2 VD8.2 VD9.2 VD10.2 VD13.2 VD14.2 VD17.2 VD18.2 VD19.2 X1.4 X1.10 X2.3 X3.3 X4.5 X5.5 X6.10 X7.73 X7.74 X8.5 X9.5 X10.5 X11.5 X14.2 X15.4 X16.4 X17.6
LED: X7.10 X12.1
LED1: R7.2 X7.7
LED2: R8.2 X7.8
LED3: R9.2 X7.9
LSesn1: X6.1 X7.55
LSesn2: X6.2 X7.56
LSesn3: X6.3 X7.57
LSesn4: X6.4 X7.58
LSesn5: X6.5 X7.59
LSesn6: X6.6 X7.60
LSesn7: X6.7 X7.61
LSesn8: X6.8 X7.62
MISO_nRF: DD1.10 X1.8 X17.2
MOSI_nRF: DD1.11 X1.7 X17.1
MOT1A: DA1.4 VD2.2 VD10.1 X8.1
MOT1B: DA1.16 VD4.1 VD12.2 X10.1
MOT1C: DA2.4 VD6.2 VD14.1 X9.1
MOT1D: DA2.16 VD8.1 VD16.2 X11.1
MOT2A: DA1.5 VD1.2 VD9.1 X8.6
MOT2B: DA1.17 VD3.1 VD11.2 X10.6
MOT2C: DA2.5 VD5.2 VD13.1 X9.6
MOT2D: DA2.17 VD7.1 VD15.2 X11.6
MotEn1A: DA1.8 X7.11
MotEn1B: DA2.8 X7.13
MotEn2A: DA1.14 X7.12
MotEn2B: DA2.14 X7.14
MotIn1A: DA1.7 X7.15
MotIn1B: DA2.7 X7.23
MotIn2A: DA1.9 X7.16
MotIn2B: DA2.9 X7.24
MotIn3A: DA1.13 X7.17
MotIn3B: DA2.13 X7.25
MotIn4A: DA1.15 X7.18
MotIn4B: DA2.15 X7.26
NetR4_1: R4.1 X12.2
NetR7_1: R7.1 VD17.1
NetR8_1: R8.1 VD19.1
NetR9_1: R9.1 VD18.1
RX: X1.2 X7.31
RX_nRF: DD1.8 X16.2
SCK_nRF: DD1.9 X17.3
SCL: X4.2 X5.2 X7.22
SCL_nRF: DD1.6 X15.2
SDA: X4.1 X5.1 X7.21
SDA_nRF: DD1.5 X15.1
ServoA: X2.1 X7.5
ServoB: X3.1 X7.6
Sound: L1.1 X7.45
TX: X1.1 X7.30
TX_nRF: DD1.7 X16.1
Vbat: C1.2 C2.2 DA1.6 DA2.6 DA3.2 DA4.2 R1.1 VD1.1 VD2.1 VD5.1 VD6.1 VD11.1 VD12.1 VD15.1 VD16.1 X14.1
Voltage: R1.2 R2.1 X7.43
XSHUT1: X4.3 X7.64
XSHUT2: X5.3 X7.65
pads on no net: DA1.3 DA1.18 DA1.21 DA1.22 DA1.23 DA2.3 DA2.18 DA2.21 DA2.22 DA2.23 DD1.2 DD1.3 DD1.4 X1.5 X1.6 X1.11 X1.12 X7.1 X7.2 X7.32 X7.33 X7.34 X7.35 X7.36 X7.37 X7.38 X7.39 X7.40 X7.41 X7.42 X7.44 X7.46 X7.51 X7.52 X7.53 X7.54 X7.63 X7.66 X7.67 X7.68 X7.69 X7.70 X7.71 X7.72 X14.3 X14.4
copper on no net:
  other v1: 41.911,71.429 42.911,71.429 43.911,71.429 44.911,71.429 45.911,71.429 41.911,72.429 42.911,72.429 43.911,72.429 44.911,72.429 45.911,72.429 41.911,73.429 42.911,73.429 43.911,73.429 44.911,73.429 45.911,73.429 41.911,74.429 42.911,74.429 43.911,74.429 44.911,74.429 45.911,74.429 41.911,75.429 42.911,75.429 43.911,75.429 44.911,75.429 45.911,75.429 41.911,76.429 42.911,76.429 43.911,76.429 44.911,76.429 45.911,76.429 41.911,77.429 42.911,77.429 43.911,77.429 44.911,77.429 45.911,77.429 41.911,78.429 42.911,78.429 43.911,78.429 44.911,78.429 45.911,78.429 41.911,79.429 42.911,79.429 43.911,79.429 44.911,79.429 45.911,79.429 42,89.3 43,89.3 44,89.3 45,89.3 46,89.3 42,90.3 43,90.3 44,90.3 45,90.3 46,90.3 42,91.3 43,91.3 44,91.3 45,91.3 46,91.3 42,92.3 43,92.3 44,92.3 45,92.3 46,92.3 42,93.3 43,93.3 44,93.3 45,93.3 46,93.3 42,94.3 43,94.3 44,94.3 45,94.3 46,94.3 42,95.3 43,95.3 44,95.3 45,95.3 46,95.3 42,96.3 43,96.3 44,96.3 45,96.3 46,96.3 42,97.3 43,97.3 44,97.3 45,97.3 46,97.3

## Silkscreen, mask and mechanical layers (free items; w line width, h text height)
Mechanical 1:
  lines w0.25: 0.125,5 0.125,110 ; 5,0.125 110,0.125 ; 5,114.875 110,114.875 ; 114.875,5 114.875,110
  lines w0.254: 0.125,5 ccw(c5,5) 5,0.125 ; 0.125,110 cw(c5,110) 5,114.875 ; 110,0.125 ccw(c110,5) 114.875,5 ; 110,114.875 cw(c110,110) 114.875,110

## Text inside footprints (layer, text, board x,y; h text height)
DA3: Top Overlay "OUT-" at 6.551,68.375 h1.6; Top Overlay "OUT+" at 6.451,78.675 h1.6; Top Overlay "IN-" at 17.201,68.525 h1.6; Top Overlay "IN+" at 17.151,78.625 h1.6
DA4: Top Overlay "OUT-" at 6.551,83.975 h1.6; Top Overlay "OUT+" at 6.451,94.275 h1.6; Top Overlay "IN-" at 17.201,84.125 h1.6; Top Overlay "IN+" at 17.151,94.225 h1.6